# Altium PCB PCB_EIT_Spectra.pcbdoc (part 2 of 2)
Units mil, origin at the board's own origin, x right, y up, seen from the top; angles counter-clockwise.
Board outline 4400 x 3850 mil, 2 copper layers (Top Layer, Bottom Layer); 90 components, 116 nets, 615 pads, 256 vias.
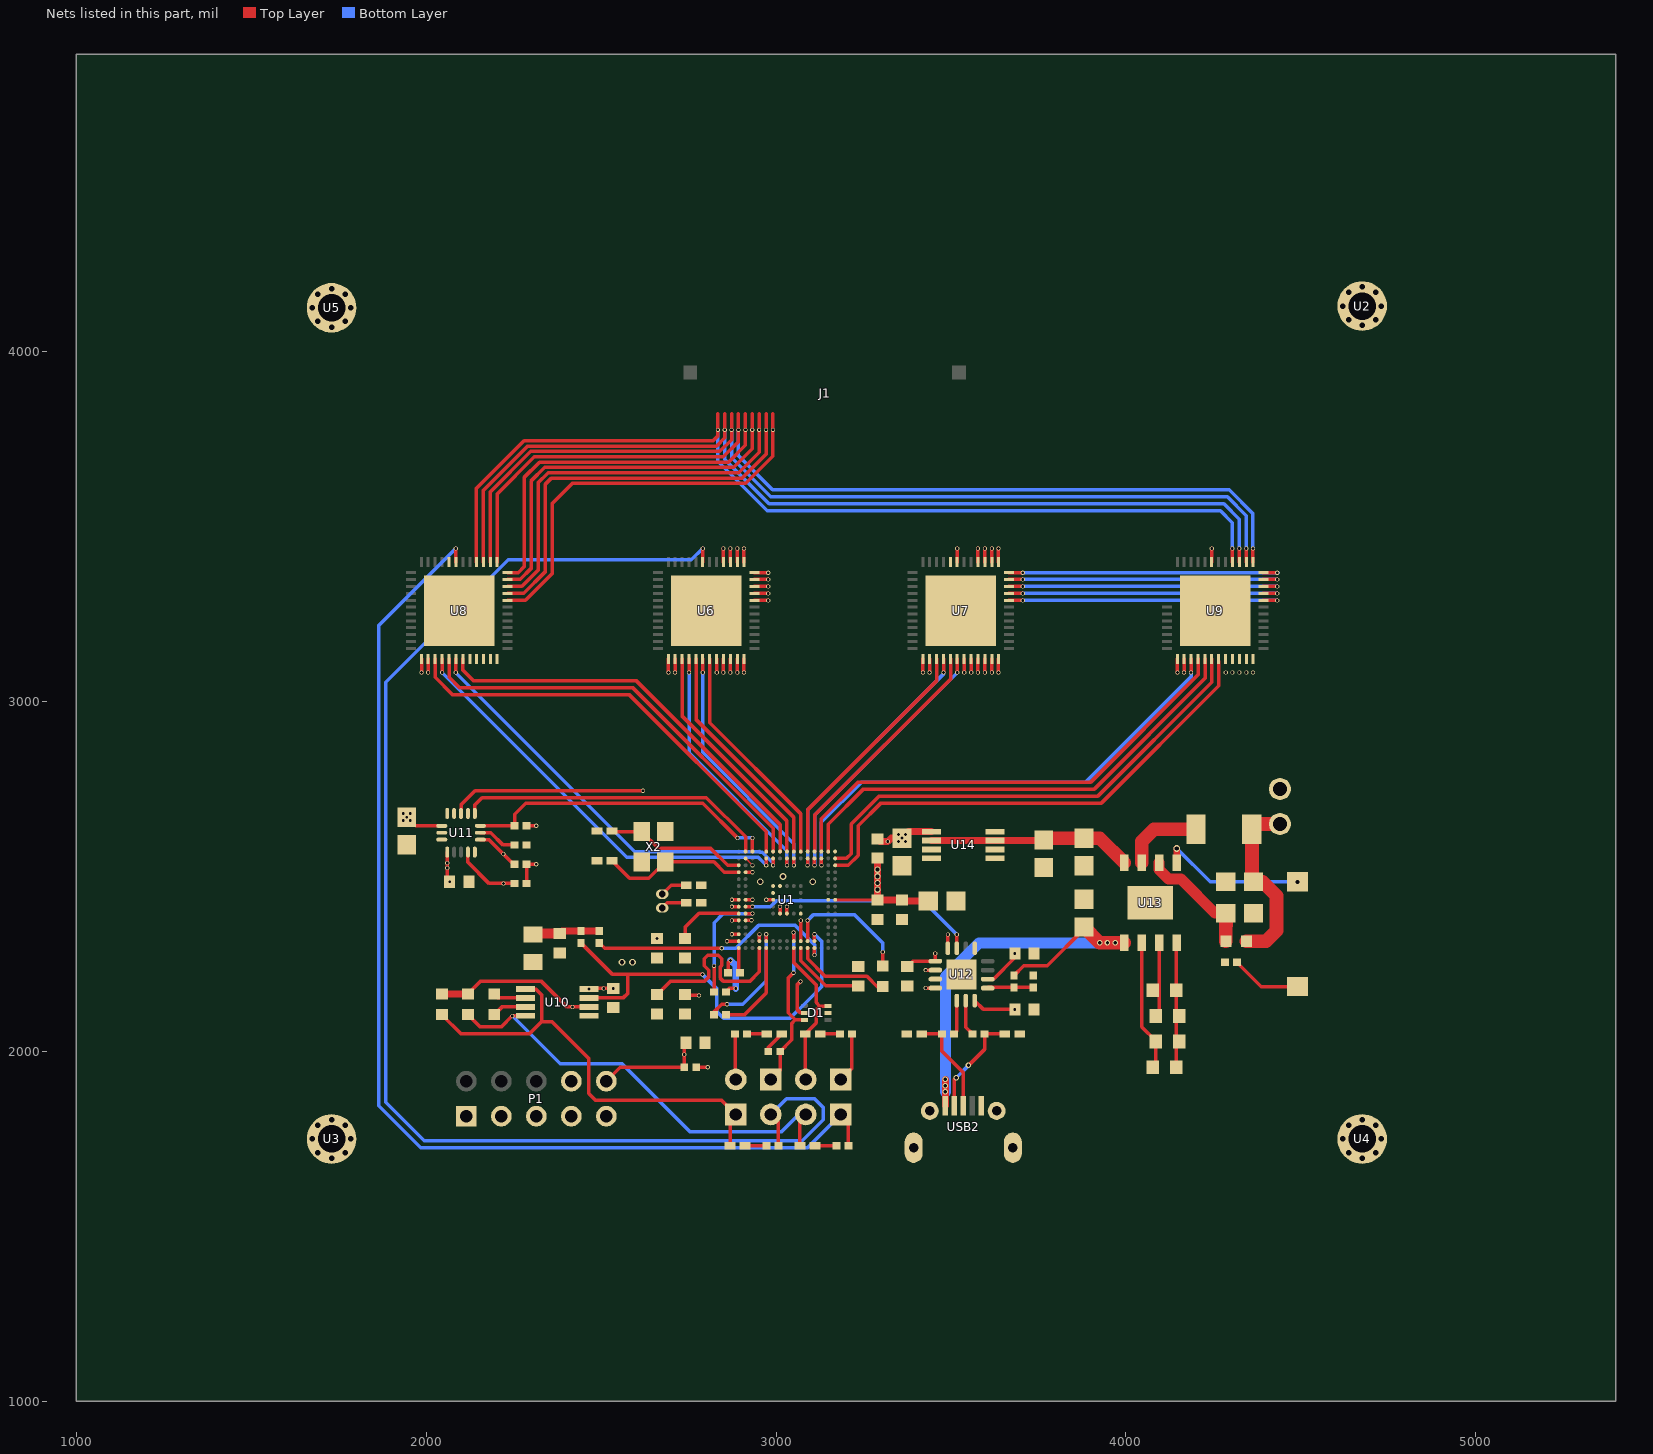
[diagram p2: the nets of this part, all layers, seen from the top]

## Via types
v1: diameter 11.81, hole 7.87, Top Layer to Bottom Layer, tented both sides, 237 vias
v2: diameter 15.75, hole 9.84, Top Layer to Bottom Layer, tented both sides, 8 vias
v3: diameter 19.69, hole 11.81, Top Layer to Bottom Layer, tented both sides, 7 vias
v4: diameter 17.72, hole 11.81, Top Layer to Bottom Layer, tented both sides, 4 vias

## Nets (pads, with @x,y where several pads share a name; then routed paths per layer and width w, separated by ;. In a path a pad name is that pad's centre, name@x,y a point inside that pad or via, vN(x,y) a via of type N, cw(c..) or ccw(c..) an arc to the next point about the centre after c; other vN are vias at no path point) (continued)
24: J1.24 U6.32 U7.32 U8.32 U9.32 | length 3894.3
  Top Layer w10: U8.32@2233,3289 2284,3289 2360,3365 2360,3565 2418.4,3623.4 2913.4,3623.4 2991.2,3701.2 v1(2991.22,3776.26) ; U6.32@2938.51,3288.99 v1(2977.87,3289) ; v1(2991.22,3776.26) J1.24@2991.22,3821.89 ; U7.32@3665.75,3289 v1(3705.13,3289) ; U9.32@4393,3289 v1(4432.38,3289)
  Mid-Layer 2 w10: v1(2977.87,3289) 2978.88,3290 3030,3290 3100,3360 3100,3525 2991.22,3633.78 v1(2991.22,3776.26)
  Mid-Layer 3 w10: v1(2991.22,3776.26) 2991.2,3683.8 3049,3626 3644,3626 3830,3440 3830,3355 3765,3290 v1@3705,3290
  Bottom Layer w10: v1(3705.13,3289) v1(4432.38,3289)
25: J1.25 U6.33 U7.33 U8.33 U9.33 | length 3827.2
  Top Layer w10: U8.33@2233,3309 2279,3309 2340,3370 2340,3620 2358.6,3638.6 2903.6,3638.6 2971.5,3706.5 v1(2971.54,3776.26) ; U6.33@2938.51,3308.99 v1(2977.87,3309) ; v1(2971.54,3776.26) J1.25@2971.54,3821.89 ; U7.33@3665.75,3309 v1(3705.13,3309) ; U9.33@4393,3309 v1(4432.38,3309)
  Mid-Layer 2 w10: v1(2971.54,3776.26) 2971.54,3623.46 3080,3515 3080,3370 3020,3310 2978.88,3310 v1(2977.87,3309)
  Mid-Layer 3 w10: v1(2971.54,3776.26) 2971.5,3678.5 3039.2,3610.8 3634.2,3610.8 3810,3435 3810,3360 3759,3309 v1(3705.13,3309)
  Bottom Layer w10: v1(3705.13,3309) v1(4432.38,3309)
26: J1.26 U6.34 U7.34 U8.34 U9.34 | length 3727.5
  Top Layer w10: U8.34@2233,3329 2274,3329 2320,3375 2320,3625 2348.8,3653.8 2893.8,3653.8 2951.9,3711.9 v1@2951.9,3776.3 ; U6.34@2938.51,3328.99 v1(2977.87,3329) ; v1(2951.85,3776.26) J1.26@2951.85,3821.89 ; U7.34@3665.75,3329 v1(3705.13,3329) ; U9.34@4393,3329 v1(4432.38,3329)
  Mid-Layer 2 w10: v1(2951.85,3776.26) 2951.85,3618.15 3060,3510 3060,3380 3009,3329 v1(2977.87,3329)
  Mid-Layer 3 w10: v1@2951.9,3776.3 2951.9,3673.1 3029.4,3595.6 3624.4,3595.6 3790,3430 3790,3370 3750,3330 3706.1,3330 v1(3705.13,3329)
  Bottom Layer w10: v1(3705.13,3329) v1(4432.38,3329)
27: J1.27 U6.35 U7.35 U8.35 U9.35 | length 3627.9
  Top Layer w10: U8.35@2233,3349 2269,3349 2300,3380 2300,3630 2339,3669 2879,3669 2932.2,3722.2 v1(2932.17,3776.26) ; v1(2932.17,3776.26) J1.27@2932.17,3821.89 ; U6.35@2938.51,3348.99 v1(2977.87,3349) ; U7.35@3665.75,3349 v1(3705.13,3349) ; U9.35@4393,3349 v1(4432.38,3349)
  Mid-Layer 2 w10: v1(2932.17,3776.26) 2932.17,3607.83 3040,3500 3040,3385 3005,3350 2978.88,3350 v1(2977.87,3349)
  Mid-Layer 3 w10: v1(2932.17,3776.26) 2932.2,3667.8 3019.6,3580.4 3614.6,3580.4 3770,3425 3770,3380 3739,3349 v1(3705.13,3349)
  Bottom Layer w10: v1(3705.13,3349) v1(4432.38,3349)
28: J1.28 U6.36 U7.36 U8.36 U9.36 | length 3535.1
  Top Layer w10: U8.36@2233,3368 2263,3368 2280,3385 2280,3640 2324.2,3684.2 2864.2,3684.2 2912.5,3732.5 v1(2912.48,3776.26) ; v1(2912.48,3776.26) J1.28@2912.48,3821.89 ; U6.36@2938.51,3367.99 v1(2977.87,3368) ; U7.36@3665.75,3368 v1(3705.13,3368) ; U9.36@4393,3368 v1(4432.38,3368)
  Mid-Layer 2 w10: v1(2912.48,3776.26) 2912.5,3602.5 3020,3495 3020,3390 2998,3368 v1(2977.87,3368)
  Mid-Layer 3 w10: v1(2912.48,3776.26) 2912.5,3662.5 3009.8,3565.2 3604.8,3565.2 3750,3420 3750,3390 3728,3368 v1(3705.13,3368)
  Bottom Layer w10: v1(3705.13,3368) v1@4435,3368
29: J1.29 U6.37 U7.37 U8.37 U9.37 | length 4444.1
  Top Layer w10: U8.37@2203,3398 2203,3593 2309.4,3699.4 2849.4,3699.4 2892.8,3742.8 v1(2892.8,3776.26) ; v1(2892.8,3776.26) J1.29@2892.8,3821.89 ; U6.37@2908.51,3397.99 v1(2908.5,3437.37) ; U7.37@3635.75,3398 v1(3635.76,3437.37) ; U9.37@4363,3398 v1(4363.01,3437.37)
  Mid-Layer 2 w10: v1(2892.8,3776.26) 2892.8,3692.8 2870,3670 2740,3670 2730,3660 2730,3645 2740,3635 2835,3635 2910,3560 2910,3438.9 v1(2908.5,3437.37)
  Mid-Layer 3 w10: v1(2892.8,3776.26) 2892.8,3657.2 3000,3550 3560,3550 3635,3475 v1(3635.76,3437.37)
  Bottom Layer w10: v1(2892.8,3776.26) 2892.8,3702.2 2990,3605 4295,3605 4363,3537 v1(4363.01,3437.37)
30: J1.30 U6.38 U7.38 U8.38 U9.38 | length 4432.3
  Top Layer w10: U8.38@2184,3398 2184,3599 2299.6,3714.6 2839.6,3714.6 2873.1,3748.1 v1(2873.11,3776.26) ; v1(2873.11,3776.26) J1.30@2873.11,3821.89 ; U6.38@2889.51,3397.99 v1(2889.49,3437.37) ; U7.38@3616.75,3398 v1@3616.75,3437.37 ; U9.38@4344,3398 v1(4344,3437.37)
  Mid-Layer 2 w10: v1(2873.11,3776.26) 2873.1,3708.1 2855,3690 2735,3690 2710,3665 2710,3640 2735,3615 2820,3615 2889.5,3545.5 v1(2889.49,3437.37)
  Mid-Layer 3 w10: v1(2873.11,3776.26) 2873.1,3651.9 2990.2,3534.8 3550.2,3534.8 3616.7,3468.3 v1@3616.7,3437.4
  Bottom Layer w10: v1(2873.11,3776.26) 2873.1,3696.9 2985,3585 4290,3585 4344,3531 v1(4344,3437.37)
  other v1: 3616.75,3437.37
31: J1.31 U6.39 U7.39 U8.39 U9.39 | length 4420.6
  Top Layer w10: U8.39@2164,3398 2164,3604 2289.8,3729.8 2829.8,3729.8 2853.4,3753.4 v1(2853.43,3776.26) ; v1(2853.43,3776.26) J1.31@2853.43,3821.89 ; U6.39@2869.51,3397.99 v1(2869.49,3437.37) ; U7.39@3596.75,3398 v1@3596.75,3437.37 ; U9.39@4324,3398 v1(4324,3437.37)
  Mid-Layer 2 w10: v1(2853.43,3776.26) 2853.4,3728.4 2835,3710 2725,3710 2690,3675 2690,3630 2725,3595 2805,3595 2869.5,3530.5 v1(2869.49,3437.37)
  Mid-Layer 3 w10: v1(2853.43,3776.26) 2853.4,3646.6 2980.5,3519.5 3540.5,3519.5 3596.7,3463.3 v1@3596.7,3437.4
  Bottom Layer w10: v1(2853.43,3776.26) 2853.4,3691.6 2980,3565 4280,3565 4324,3521 v1(4324,3437.37)
  other v1: 3596.75,3437.37
32: J1.32 U6.40 U7.40 U8.40 U9.40 | length 4417.6
  Top Layer w10: U8.40@2144,3398 2144,3609 2280,3745 2820,3745 2833.7,3758.7 v1(2833.74,3776.26) ; v1(2833.74,3776.26) J1.32@2833.74,3821.89 ; U6.40@2849.51,3397.99 v1(2849.49,3437.37) ; U7.40@3576.75,3398 v1@3576.75,3437.37 ; U9.40@4304,3398 v1(4304,3437.37)
  Mid-Layer 2 w10: v1(2833.74,3776.26) 2833.7,3748.7 2815,3730 2710,3730 2670,3690 2670,3615 2710,3575 2795,3575 2849.5,3520.5 v1(2849.49,3437.37)
  Mid-Layer 3 w10: v1(2833.74,3776.26) 2833.7,3641.3 2970.9,3504.1 3530.9,3504.1 3576.7,3458.3 v1@3576.7,3437.4
  Bottom Layer w10: v1(2833.74,3776.26) 2833.7,3686.3 2975,3545 4270,3545 4304,3511 v1(4304,3437.37)
  other v1: 3576.75,3437.37
+5V: C25.2 R24.2 U13.1 USB2.1 | length 1324.4
  Top Layer w10: R24.2@3680,2217.04 3707.95,2245 3775,2245 3880,2350 C25.2@3880,2355.63
  Top Layer w19.68: USB2.1@3483.82,1844.89 v2(3483.8,1884.33) 3483.8,1902.48 v2(3483.8,1920)
  Top Layer w39.37: C25.2@3880,2355.63 v2(3925.13,2310.5) 3948.12,2310.5 v2(3969.23,2310.5) U13.1@3995,2310.5
  Bottom Layer w31.5: v2(3483.8,1884.33) v2(3483.8,1920) 3483.8,2213.8 3580.5,2310.5 v2(3969.23,2310.5)
  other v2: 3483.8,1902.16 3947.18,2310.5
A0_A_MINUS: U1.A5 U8.15 | length 1238.5
  Top Layer w10: U8.15@2026,3122 2026,3069 2075,3020 2580,3020 2972.2,2627.8 U1.A5@2972.16,2571.29
A0_A_PLUS: U1.A8 U6.15 | length 674.9
  Top Layer w10: U6.15@2731.51,3121.99 2731.51,2958.49 3030,2660 3030,2572.5 U1.A8@3031.22,2571.29
A0_V_MINUS: U1.A11 U7.15 | length 703.4
  Top Layer w10: U1.A11@3090.27,2571.29 3090,2690 3458.7,3058.7 U7.15@3458.7,3122
A0_V_PLUS: U1.B13 U9.15 | length 1422.3
  Top Layer w10: v1(3129.65,2531.92) U1.B13@3129.64,2551.6 ; v1(4186,3082.63) U9.15@4186,3122
  Bottom Layer w10: v1(3129.65,2531.92) 3129.6,2654.7 3245,2770 3885,2770 4186,3071 v1(4186,3082.63)
A1_A_MINUS: U1.B5 U8.16 | length 1213.3
  Top Layer w10: v1(2046,3082.63) U8.16@2046,3122 ; v1(2972.17,2531.92) U1.B5@2972.16,2551.6
  Bottom Layer w10: v1(2046,3082.63) 2573.63,2555 2949.09,2555 v1(2972.17,2531.92)
A1_A_PLUS: U1.B8 U6.16 | length 725.6
  Top Layer w10: v1(2751.51,3082.63) U6.16@2751.51,3121.99 ; v1(3031.22,2531.92) U1.B8@3031.22,2551.6
  Bottom Layer w10: v1(2751.51,3082.63) 2751.5,2853.5 3031.2,2573.8 v1(3031.22,2531.92)
A1_V_MINUS: U1.B11 U7.16 | length 770.7
  Top Layer w10: v1(3090.28,2531.92) U1.B11@3090.27,2551.6 ; v1@3478.75,3082.63 U7.16@3478.75,3122
  Bottom Layer w10: v1(3090.28,2531.92) 3090.28,2690.28 3478.75,3078.75 v1@3478.75,3082.63
  other v1: 3478.75,3082.63
A1_V_PLUS: U1.A13 U9.16 | length 1386.1
  Top Layer w10: U1.A13@3129.64,2571.29 3129.6,2664.6 3235,2770 3900,2770 4206,3076 U9.16@4206,3122
A2_A_MINUS: U1.A6 U8.17 | length 1224.2
  Top Layer w10: U8.17@2066,3122 2066,3069 2095,3040 2590,3040 2991.9,2638.1 U1.A6@2991.9,2571.3
A2_A_PLUS: U1.A9 U6.17 | length 666.1
  Top Layer w10: U6.17@2771.51,3121.99 2771.5,2948.5 3050,2670 U1.A9@3050.9,2571.29
A2_V_MINUS: U1.A12 U7.17 | length 711.7
  Top Layer w10: U1.A12@3109.96,2571.29 3110,2675 3498.7,3063.7 U7.17@3498.7,3122
A2_V_PLUS: U1.A14 U9.17 | length 1383.3
  Top Layer w10: U1.A14@3149.33,2571.29 3149.3,2649.3 3250,2750 3910,2750 4226,3066 U9.17@4226,3122
A3_A_MINUS: U1.B6 U8.18 | length 1198
  Top Layer w10: v1(2085,3082.63) U8.18@2085,3122 ; v1(2991.85,2531.92) U1.B6@2991.85,2551.6
  Bottom Layer w10: v1(2085,3082.63) 2596.5,2570.2 2953.6,2570.2 2954.7,2569.1 2960.9,2569.1 2991.9,2538.1 v1@2991.9,2531.9
A3_A_PLUS: U1.B9 U6.18 | length 717.6
  Top Layer w10: v1(2790.51,3082.63) U6.18@2790.51,3121.99 ; v1(3050.91,2531.92) U1.B9@3050.9,2551.6
  Bottom Layer w10: v1(2790.51,3082.63) 2790.51,2854.49 3050.91,2594.09 v1(3050.91,2531.92)
A3_V_MINUS: U1.B12 U7.18 | length 778.7
  Top Layer w10: v1(3109.96,2531.92) U1.B12@3109.96,2551.6 ; v1@3517.75,3082.63 U7.18@3517.75,3122
  Bottom Layer w10: v1(3109.96,2531.92) 3110,2675 v1@3517.7,3082.6
  other v1: 3517.75,3082.63
A3_V_PLUS: U1.B15 U9.18 | length 1401.3
  Top Layer w10: U1.B15@3169.01,2551.6 3201.6,2551.6 3215,2565 3215,2650 3295,2730 3920,2730 4245,3055 U9.18@4245,3122
A4_A_MINUS: U1.A7 U8.19 | length 1198.6
  Top Layer w10: U8.19@2105,3122 2105,3090 2135,3060 2600,3060 3011.54,2648.46 U1.A7@3011.53,2571.29
A4_A_PLUS: U1.A10 U6.19 | length 658.2
  Top Layer w10: U6.19@2810.51,3121.99 2810.5,2939.5 3070,2680 U1.A10@3070.59,2571.29
A4_V_MINUS: U1.K7 U7.19 | length 995.6
  Top Layer w10: U1.K7@3011.53,2394.12 v1(3011.54,2413.81) ; v1@3537.75,3082.63 U7.19@3537.75,3122
  Mid-Layer 3 w10: v1(3011.54,2413.81) 3011.5,2436.5 3030,2455 3115,2455 3537.7,2877.7 v1@3537.7,3082.6
  other v1: 3537.75,3082.63
A4_V_PLUS: U1.C15 U9.19 | length 1428.3
  Top Layer w10: U1.C15@3169.01,2531.92 3206.9,2531.9 3235,2560 3235,2645 3300,2710 3930,2710 4265,3045 U9.19@4265,3115
A_MINUS: H3.1 R12.2 U8.43 | length 3231.1
  Top Layer w10: U8.43@2085,3398 v1(2085,3437.37) ; H3.1@3185,1820 3207.05,1797.95 R12.2@3207.04,1730
  Bottom Layer w10: v1(2085,3437.37) 1865,3217.37 1865,1845 1985,1725 3090,1725 H3.1@3185,1820
A_PLUS: H2.2 R11.2 U6.43 | length 3936.8
  Top Layer w10: U6.43@2790.51,3397.99 v1(2790.49,3437.37) ; H2.2@2985,1820 3007.05,1797.96 R11.2@3007.04,1730
  Bottom Layer w10: v1(2790.49,3437.37) 2758.1,3405 2235,3405 1885,3055 1885,1855 1995,1745 3075,1745 3135,1805 3135,1840 3110,1865 3030,1865 H2.2@2985,1820
ACC_CS: R17.1 U1.A3 U11.8 | length 903.9
  Top Layer w10: U11.8@2155.12,2644.69 R17.1@2252.96,2645 ; R17.1@2252.96,2645 2252.96,2677.96 2284.81,2709.81 2790.19,2709.81 v1(2890,2610) ; U1.A3@2932.79,2571.29 v1(2932.79,2610)
  Bottom Layer w10: v1(2890,2610) v1(2932.79,2610)
ACC_INT1: U1.B2 U11.11 | length 990.4
  Top Layer w5: U1.B2@2913.11,2551.6 v1(2932.79,2531.92)
  Top Layer w10: U11.11@2100,2680.12 2100,2705 2140,2745 v1(2620,2745)
  Mid-Layer 3 w10: v1(2620,2745) 2719.71,2745 v1(2932.79,2531.92)
ACC_INT2: U1.A2 U11.9 | length 894.7
  Top Layer w10: U11.9@2139.37,2680.12 2139.4,2704.4 2160,2725 2801.2,2725 2913.1,2613.1 U1.A2@2913.11,2571.29
AFE7: C17.2 D1.3 H5.2 U1.R9 | length 447.5
  Top Layer w10: U1.R9@3050.9,2295.7 3050.9,2254.1 3115,2190 3115,2140 3124.7,2129.7 ; H5.2@3085,1920 3083.54,1921.46 C17.2@3083.54,2050 3115,2081.46 3115,2120 3124.68,2129.68 ; D1.3@3148.46,2129.68 3124.68,2129.68
AFE8: D1.6 H1.1 R9.1 U1.P9 | length 514.6
  Top Layer w10: H1.1@2985,1920 3012.05,1947.04 R9.1@3012.04,2000 3045,2032.95 3045,2080 3055.32,2090.32 ; v1(3050,2225) 3035,2210 3035,2110.63 3055.32,2090.32 ; v1(3050,2340) U1.P9@3050.9,2315.38 ; D1.6@3081.53,2090.31 3055.32,2090.32
  Bottom Layer w10: v1(3050,2225) v1(3050,2340)
AN_A: R20.2 U1.P12 U10.7 | length 1200
  Top Layer w10: R20.2@2442.78,2310.12 2532.9,2220 v1(2790,2220) ; U10.7@2465.6,2152.8 2562.8,2152.8 2576.9,2166.9 2576.9,2220 ; U1.P12@3109.96,2315.38 v1(3109.96,2335.07)
  Bottom Layer w10: v1(2790,2220) 2830,2180 2830,2115 2850,2095 3040,2095 3097.5,2152.5 3130,2185 3130,2315 v1(3109.96,2335.07)
BAT: C27.2 CN1.1 L1.2 R26.2 | length 520.9
  Top Layer w39.37: R26.2@4344.65,2315 4400,2315 4430,2345 4430,2445 4390,2485 C27.2@4364.37,2485 4359.84,2485 L1.2@4359.84,2635 4374.85,2650 CN1.1@4440,2650
C13_1: C13.1 R10.1 | length 56.5
  Top Layer w10: R10.1@2917.04,2050 C13.1@2973.54,2050
C13_2: C13.2 R9.2 | length 65.9
  Top Layer w10: R9.2@2977.96,2000 2977.95,2011.5 C13.2@3016.46,2050
C17_1: C17.1 R14.1 | length 56.5
  Top Layer w10: C17.1@3126.46,2050 R14.1@3182.96,2050
DMINUS: C20.2 R22.1 USB2.2 | length 298.4
  Top Layer w10: USB2.2@3509.41,1844.89 3510,1920 v2(3515,1925) ; v2(3550,1960) 3595.77,2005.77 R22.1@3595.76,2050 C20.2@3653.54,2050
  Bottom Layer w10: v2(3515,1925) v2(3550,1960)
DPLUS: C19.2 R21.1 USB2.3 | length 288.1
  Top Layer w10: C19.2@3416.46,2050 R21.1@3474.24,2050 ; R21.1@3474.24,2050 3474.2,2000.8 3535,1940 USB2.3@3535,1844.89
GND: C1.2 C2.2 C3.2 C4.2 C5.2 C6.2 C7.1 C8.1 C9.2 C10.1 C11.2 C12.1 C16.2 C18.1 C19.1 C20.1 C21.1 C22.1 C23.1 C24.1 C25.1 C26.1 C27.1 C28.1 C29.1 C30.1 C31.1 C32.1 CN1.2 D1.2 P1.3 P1.5 P1.9 R16.1 R19.1 R23.2 R25.1 U1.F6 U1.F7 U1.G6 U1.H14 U1.K10 U2.GND U3.GND U4.GND U5.GND U6.20 U6.21 U6.22 U6.23 U6.24 U6.49 U7.20 U7.21 U7.22 U7.23 U7.24 U7.49 U8.20 U8.21 U8.22 U8.23 U8.24 U8.49 U9.20 U9.21 U9.22 U9.23 U9.24 U9.49 U10.5 U11.5 U11.10 U11.12 U11.13 U11.15 U11.16 U12.3 U12.13 U12.17 U13.9 U14.3 U14.4 U14.5 U14.6 U14.8 USB2.5 USB2.6 USB2.7 USB2.8 USB2.9 X2.2 X2.4 | length 393.7
  Top Layer w10: v1(2830.49,3082.63) U6.20@2830.51,3121.99 ; v1(2849.49,3082.63) U6.21@2849.51,3121.99 ; v1(2869.49,3082.63) U6.22@2869.51,3121.99 ; v1(2889.49,3082.63) U6.23@2889.51,3121.99 ; v1(2908.5,3082.63) U6.24@2908.51,3121.99 ; v1@3557.75,3082.63 U7.20@3557.75,3122 ; v1@3576.75,3082.63 U7.21@3576.75,3122 ; v1@3596.75,3082.63 U7.22@3596.75,3122 ; v1@3616.75,3082.63 U7.23@3616.75,3122 ; v1(3635.76,3082.63) U7.24@3635.75,3122
  other v1: 3557.75,3082.63 3576.75,3082.63 3596.75,3082.63 3616.75,3082.63 4285,3082.63 4304,3082.63 4324,3082.63 4344,3082.63 4363.01,3082.63
  other v3: 2560,2255 2590,2255 2955,2485 3105,2485 3020,2500
HF_XTAL1: C9.1 U1.D1 X2.3 | length 414.2
  Top Layer w10: C9.1@2531.46,2545 2581.46,2495 2636.77,2495 X2.3@2683.47,2541.69 ; X2.3@2683.47,2541.69 2822.7,2541.7 2852.2,2512.2 U1.D1@2893.42,2512.23
HF_XTAL2: C10.2 U1.C1 X2.1 | length 402.6
  Top Layer w10: C10.2@2531.46,2630 2533.15,2628.31 X2.1@2616.54,2628.31 ; X2.1@2616.54,2628.31 2664.8,2580 2813.8,2580 2861.9,2531.9 U1.C1@2893.42,2531.92
INAMP_M: C14.2 H2.1 R6.1 U10.1 | length 1271.8
  Top Layer w10: R6.1@2045,2105.34 2100.3,2050 2295,2050 2330,2085 ; U10.1@2284.45,2178.39 2313.4,2178.4 2330,2161.8 2330,2085 ; C14.2@2868.54,1730 2868.54,1803.54 H2.1@2885,1820 2845.01,1860 2485,1860 2465,1880 2465,1980 2360,2085 2330,2085
INAMP_P: C15.2 H3.2 R7.2 U10.4 | length 1285.4
  Top Layer w10: R7.2@2120,2105.34 2155.34,2070 2215,2070 v1(2246.61,2101.61) U10.4@2284.45,2101.61 ; C15.2@3068.54,1730 3068.54,1803.55 H3.2@3085,1820
  Bottom Layer w10: v1(2246.61,2101.61) 2383.22,1965 2560,1965 2755,1770 3015,1770 3065,1820 H3.2@3085,1820
KEY1_2: KEY1.2 R25.2 | length 201.8
  Top Layer w10: R25.2@4317.04,2255 4386.65,2185.39 KEY1.2@4490,2185.39
LF_XTAL1: C7.2 U1.P1 X1.2 | length 332.7
  Top Layer w10: X1.2@2675,2410.32 2689.69,2425 C7.2@2743.54,2425 ; v1(2860,2315) 2893.05,2315 U1.P1@2893.42,2315.38
  Mid-Layer 2 w10: X1.2@2675,2410.32 2770.32,2315 v1(2860,2315)
LF_XTAL2: C8.2 U1.N1 X1.1 | length 344.9
  Top Layer w10: X1.1@2675,2449.68 2700.32,2475 C8.2@2743.54,2475 ; v1(2873.74,2335.06) U1.N1@2893.42,2335.07
  Mid-Layer 2 w10: X1.1@2675,2449.68 2789.63,2335.06 v1(2873.74,2335.06)
P0.6: U1.J1 U12.2 | length 692.4
  Top Layer w10: v1(2873.74,2413.8) U1.J1@2893.42,2413.81 ; v1(3427.63,2232.4) U12.2@3455.2,2232.4
  Mid-Layer 2 w10: v1(2873.74,2413.8) 2873.7,2401.3 2915,2360 2915,2345 2945,2315 3345,2315 v1(3427.63,2232.4)
P0.7: U1.J2 U12.15 | length 689.3
  Top Layer w10: U1.J2@2913.11,2413.81 v1(2932.79,2413.8) ; U12.15@3516.6,2294.8 v1(3516.6,2334.17)
  Bottom Layer w10: v1(2932.79,2413.8) 2983.8,2413.8 3000,2430 3420.77,2430 v1(3516.6,2334.17)
P0.8: P1.2 U1.H1 U12.4 | length 2165.7
  Top Layer w10: v1(2873.74,2433.49) U1.H1@2893.42,2433.49 ; v1(3427.63,2181.2) U12.4@3455.2,2181.2
  Mid-Layer 2 w10: P1.2@2215,1815 2275,1875 2275,2415 2355,2495 2870,2495 2890,2475 2890,2445 2878.49,2433.49 v1(2873.74,2433.49) 2858.49,2433.49 2845,2420 2845,2370 2860,2355 2885,2355 2900,2340 2900,2270 2988.8,2181.2 v1(3427.63,2181.2)
P0.9: P1.4 U1.H2 U12.16 | length 1628.2
  Top Layer w10: U1.H2@2913.11,2433.49 v1(2932.79,2433.49) ; U12.16@3491,2294.8 v1(3491,2334.17)
  Mid-Layer 2 w10: v1(2932.79,2433.49) 2946.5,2433.5 3005,2375 3040,2375 3075,2410 3415,2410 v1(3491,2334.17)
  Mid-Layer 3 w10: P1.4@2415,1815 2470,1870 2470,2015 2720,2265 2845,2265 2965,2385 2965,2401.3 2965,2415 2946.5,2433.5 v1(2932.79,2433.49)
P0.11: R2.1 U1.K2 | length 338.3
  Top Layer w10: R2.1@2822.96,2170 v1(2822.96,2244.68) ; U1.K2@2913.11,2394.12 v1(2932.79,2394.12)
  Bottom Layer w10: v1(2822.96,2244.68) 2823,2368 2849.1,2394.1 v1(2932.79,2394.12)
P4.2: R3.2 U1.R1 | length 74.4
  Top Layer w10: U1.R1@2893.42,2295.7 2893.4,2225 R3.2@2897.1,2225
R11_1: C14.1 R11.1 | length 61.5
  Top Layer w10: C14.1@2911.46,1730 R11.1@2972.96,1730
R12_1: C15.1 R12.1 | length 61.5
  Top Layer w10: C15.1@3111.46,1730 R12.1@3172.96,1730
R18_1: C18.2 R18.1 R19.2 R20.1 | length 194.1
  Top Layer w19.68: C18.2@2382.24,2337.17 2389.28,2344.21 R20.1@2442.78,2344.2 R18.1@2495,2344.2
  Top Layer w27.56: R19.2@2305,2334.37 2307.79,2337.17 C18.2@2382.24,2337.17
REF_EXCITE: R18.2 U1.R12 | length 719.7
  Top Layer w10: R18.2@2495,2310.12 2510.12,2295 v1(2845,2295) ; v1(3109.96,2276.01) U1.R12@3109.96,2295.7
  Bottom Layer w10: v1(2845,2295) 2885,2295 2950,2360 3055,2360 3110,2305 v1(3109.96,2276.01)
RESETX: C11.1 P1.10 R4.2 U1.K8 | length 933.6
  Top Layer w10: P1.10@2515,1915 2555,1955 R4.2@2737.96,1955 2737.95,1991.25 2737.95,2020.51 C11.1@2742.45,2025 ; U1.K8@3031.22,2394.12 v1(3031.22,2413.81)
  Mid-Layer 3 w10: v1@2738,1991.3 2738,2158 2775,2195 2875,2195 3031.2,2351.2 v1(3031.22,2413.81)
  other v1: 2737.96,1991.25
S$52775: U1.A15
S$129475: U7.44
S$129821: U8.44
SCL: R13.1 U1.L1 U11.4 | length 903.4
  Top Layer w10: U11.4@2119.69,2569.88 2119.7,2540.3 2180,2480 v1(2221.57,2480) R13.1@2252.96,2480 ; v1(2873.74,2374.43) U1.L1@2893.42,2374.44
  Mid-Layer 3 w10: v1(2221.57,2480) 2327.1,2374.4 v1(2873.74,2374.43)
SDA: R15.1 U1.L2 U11.6 | length 931.5
  Top Layer w10: U11.6@2155.12,2605.32 2180,2605 v1(2220.84,2564.16) 2250,2535 R15.1@2252.96,2535 ; U1.L2@2913.11,2374.44 2913.67,2375 v1(2930,2375)
  Mid-Layer 3 w10: v1(2220.84,2564.16) 2670.84,2564.16 2840,2395 2895,2395 2915,2375 v1(2930,2375)
TIA_I: R8.1 U1.P11 | length 378.7
  Top Layer w10: U1.P11@3090.27,2315.38 v1(3090.28,2374.44) ; R8.1@3304.89,2244.66 v1(3304.89,2284.01)
  Bottom Layer w10: v1(3090.28,2374.44) 3105.8,2390 3225,2390 3304.9,2310.1 v1(3304.89,2284.01)
TIA_O: R8.2 U1.R11 | length 278.5
  Top Layer w10: U1.R11@3090.27,2295.7 3090.28,2264.72 3140,2215 3260,2215 3289.66,2185.34 R8.2@3304.89,2185.34
U1_K1: C2.1 U1.K1 | length 199
  Top Layer w10: C2.1@2740,2322.55 2740,2355 2780,2395 U1.K1@2890,2395
U1_P5: R1.2 U1.P5 | length 346.8
  Top Layer w10: R1.2@2822.96,2105 2822.95,2112.95 2845,2135 v1(2860,2135) ; U1.P5@2972.16,2315.38 v1(2972.17,2335.07)
  Bottom Layer w10: v1(2860,2135) 2905,2135 2972.2,2202.2 v1(2972.17,2335.07)
U1_R4: C1.1 U1.R4 | length 537.7
  Top Layer w10: C1.1@2660,2162.55 2697.4,2200 2795,2200 2807.8,2212.8 2807.8,2232.2 2795,2245 2795,2265 2805,2275 2835,2275 2845,2265 2845,2245.7 2840,2240.7 2840,2210 2850,2200 2925,2200 2952.48,2227.48 U1.R4@2952.48,2295.7
U1_R5: R1.1 U1.R5 | length 269.4
  Top Layer w10: R1.1@2857.1,2105 2910,2105 2972.2,2167.2 U1.R5@2972.16,2295.7
U1_R10: C6.1 U1.R10 | length 230.5
  Top Layer w10: U1.R10@3070.59,2295.7 3070.6,2259.4 3142.6,2187.4 C6.1@3235,2187.45
U10_2: R5.1 U10.2 | length 94.4
  Top Layer w10: R5.1@2195,2164.66 2206.85,2152.8 U10.2@2284.45,2152.8
U10_3: R5.2 U10.3 | length 98.5
  Top Layer w10: R5.2@2195,2105.34 2216.86,2127.2 U10.3@2284.45,2127.2
U11_7: R16.2 U11.7 | length 112.3
  Top Layer w10: U11.7@2155.12,2625 2185,2625 2220,2590 R16.2@2252.96,2590
U12_6: R21.2 U12.6 | length 98.6
  Top Layer w10: R21.2@3508.32,2050 3516.6,2058.28 U12.6@3516.6,2145.2
U12_7: R22.2 U12.7 | length 103.3
  Top Layer w10: U12.7@3542.2,2145.2 3542.2,2069.47 R22.2@3561.68,2050
U12_9: R23.1 R24.1 U12.9 | length 131
  Top Layer w10: U12.9@3604.8,2181 3606.75,2182.95 R24.1@3680,2182.96 R23.1@3735,2182.96
U13_2: LED1.1 LED2.2 U13.2 | length 375.4
  Top Layer w10: U13.2@4045,2310.5 4045,2070 4084.81,2030.19 LED2.2@4084.81,2028.33 4084.81,1963.28 LED1.1@4076.53,1955
U13_3: LED3.2 LED4.1 U13.3 | length 220.9
  Top Layer w10: LED3.2@4084.81,2101.67 4095,2111.86 U13.3@4095,2310.5 4095,2310 U13.3@4089.81,2304.81
U13_4: LED1.2 LED2.1 LED3.1 LED4.2 U13.4 | length 356.1
  Top Layer w10: LED1.2@4143.46,1955 4143.46,2308.96 U13.4@4145,2310.5
U13_5: KEY1.1 U13.5 | length 425
  Top Layer w19.68: U13.5@4145,2539.5 v3(4145,2580)
  Bottom Layer w10: v3(4145,2580) 4240.4,2484.6 v3(4490,2484.6)
U13_6: C26.2 R26.1 U13.6 | length 341.9
  Top Layer w31.5: U13.6@4095,2539.5 4095,2520 4121.82,2493.18 4156.82,2493.18 4255,2395 C26.2@4285.63,2395
  Top Layer w39.37: R26.1@4285.35,2315 C26.2@4285.63,2395
U13_7: L1.1 U13.7 | length 230.2
  Top Layer w39.37: U13.7@4045,2539.5 4045,2600 4080,2635 L1.1@4200.16,2635
U13_8: C28.2 C29.2 U13.8 U14.2 U14.7 | length 583.1
  Top Layer w19.68: U14.2@3444.45,2602.8 U14.7@3625.55,2602.8 ; U14.7@3625.6,2602.8 3765,2602.8 C28.2@3765,2604.37
  Top Layer w39.37: C28.2@3765,2604.37 3770,2609.37 C29.2@3880,2609.37 3925.13,2609.37 U13.8@3995,2539.5
V_MINUS: H1.2 R10.2 U7.43 | length 2144.4
  Top Layer w10: R10.2@2882.96,2050 2882.95,1922.05 H1.2@2885,1920 ; U7.43@3517.75,3398 v1@3517.75,3437.37
  Mid-Layer 3 w10: H1.2@2885,1920 3285,2320 3395,2320 3675,2600 3675,3280.12 v1@3517.75,3437.37
  other v1: 3517.75,3437.37
V_PLUS: H5.1 R14.2 U9.43 | length 2142
  Top Layer w10: H5.1@3185,1920 3217.05,1952.05 R14.2@3217.04,2050 ; U9.43@4245,3398 v1(4245,3437.37)
  Mid-Layer 3 w10: H5.1@3185,1920 3190,1920 4245,2975 v1(4245,3437.37)
VBIAS_1: C5.1 R6.2 R7.1 U1.P10 U10.6 | length 1355.5
  Top Layer w10: R7.1@2120,2164.66 2155.35,2200 2330,2200 2402.8,2127.2 v1(2418.61,2127.2) U10.6@2465.56,2127.2 ; C5.1@2740,2162.55 2742.55,2160 v1(2780,2160) ; U1.P10@3070.59,2315.38 v1(3070.59,2374.44)
  Top Layer w19.68: R6.2@2045,2164.66 R7.1@2120,2164.66
  Mid-Layer 2 w10: v1(2418.61,2127.2) 2451.41,2160 v1(2780,2160)
  Mid-Layer 3 w10: v1(2780,2160) 2900,2160 3070.6,2330.6 3070.6,2384.4
VCC_ANA: C3.1 C12.2 C31.2 C32.2 D1.5 L2.1 U1.D2 U1.H15 U1.P4 U6.13 U6.14 U7.13 U7.14 U8.13 U8.14 U9.13 U9.14 U10.8 | length 921.5
  Top Layer w10: v1(1987,3082.63) U8.13@1987,3122 ; v1(2006,3082.63) U8.14@2006,3122 ; v1(2465.55,2178.39) 2467.27,2180.11 v1(2507.5,2180.11) v1(2535,2180.11) ; v1(2692.49,3082.63) U6.13@2692.51,3121.99 ; v1(2711.49,3082.63) U6.14@2711.51,3121.99 ; U1.D2@2913.11,2512.23 v1(2932.79,2512.23) ; U1.P4@2952.48,2315.38 v1(2952.48,2334.68) ; v1(3070,2200) 3060,2190 3060,2120 3070.01,2109.99 D1.5@3081.53,2110 ; U1.H15@3169.01,2433.49 C3.1@3290,2432.55 ; v1@3419.75,3082.63 U7.13@3419.75,3122 ; v1@3438.75,3082.63 U7.14@3438.75,3122 ; v1(4147,3082.63) U9.13@4147,3122 ; v1(4166,3082.63) U9.14@4166,3122
  Top Layer w19.68: L2.1@3289.99,2552.45 v4(3290,2519.49) 3290,2499.49 3290,2479.49 3290,2462.35 C3.1@3290,2432.55 3322.46,2432.55 C32.2@3360,2432.55 3362.56,2430 3394.96,2430 C31.2@3435.63,2430
  other v1: 3419.75,3082.63 3438.75,3082.63
  other v4: 3290,2462.35 3290,2481.39 3290,2500.44
VCC_DIG: C4.1 C16.1 C21.2 C22.2 C23.2 C24.2 C30.2 L2.2 P1.1 R2.2 R3.1 R4.1 R13.2 R15.2 R17.2 U1.H6 U11.1 U11.14 U12.1 U12.8 U12.10 U14.1 | length 1050.4
  Top Layer w10: v1(1935,2680) 1970.31,2644.69 U11.14@2044.88,2644.69 ; U11.1@2060.63,2569.88 v1(2060.63,2538.56) v1(2060.63,2524.11) 2060.62,2491.82 v1(2067.45,2485) ; R13.2@2287.04,2480 R15.2@2287.04,2535 v1(2315,2535) ; R17.2@2287.04,2645 v1(2315,2645) ; R4.1@2772.04,1955 v1(2805,1955) ; R2.2@2857.04,2170 2867.05,2180 v1(2885,2180) ; R3.1@2862.96,2225 2862.95,2252.95 v1(2870,2260) ; v1(2972.16,2433.49) U1.H6@2991.85,2433.49 ; C23.2@3375,2242.55 3390.45,2258 U12.1@3455.2,2258 v1(3455,2280) ; U12.8@3567.8,2145.2 3593,2120 v1(3682.44,2120) ; U12.10@3604.8,2206.6 3621.6,2206.6 3682.44,2267.44 v1(3682.44,2280)
  Top Layer w19.68: L2.2@3289.99,2607.55 3297.56,2600 v1(3319.39,2600) 3329.39,2610 v1(3360,2610) 3378.39,2628.39 U14.1@3444.45,2628.39
  Bottom Layer w19.68: v1(2870,2260) 2885,2245 v1(2885,2180)
  other v1: 2660,2322.55 3350,2600 3370,2600 3350,2620 3370,2620 1935,2660 1955,2660 1945,2669.37 1955,2680
pads on no net: D1.1 D1.4 J1.MP1 J1.MP2 P1.6 P1.7 P1.8 U1.A1 U1.A4 U1.B1 U1.B3 U1.B4 U1.B7 U1.B10 U1.B14 U1.C2 U1.C14 U1.D14 U1.D15 U1.E1 U1.E2 U1.E14 U1.E15 U1.F1 U1.F2 U1.F8 U1.F9 U1.F10 U1.F14 U1.F15 U1.G1 U1.G2 U1.G10 U1.G14 U1.G15 U1.H10 U1.J6 U1.J10 U1.J14 U1.J15 U1.K6 U1.K9 U1.K14 U1.K15 U1.L14 U1.L15 U1.M1 U1.M2 U1.M14 U1.M15 U1.N2 U1.N14 U1.N15 U1.P2 U1.P3 U1.P6 U1.P7 U1.P8 U1.P13 U1.P14 U1.P15 U1.R2 U1.R3 U1.R6 U1.R7 U1.R8 U1.R13 U1.R14 U1.R15 U6.41 U6.42 U6.44 U7.41 U7.42 U8.41 U8.42 U9.41 U9.42 U9.44 U11.2 U11.3 U12.5 U12.11 U12.12 U12.14 USB2.4

## Polygon pours and split planes (outlines as drawn)
GND on Bottom Layer (solid): 1550,4305 1570,4285 1570,1580 1575,1575 4825,1575 4835,1585 4835,4290
VCC_DIG on Mid-Layer 3 (solid): 1545,4290 1550,4285 1550,1595 1560,1605 4815,1605 4825,1615 4825,4295
VCC_ANA on Mid-Layer 2 (solid): 1540,4320 1535,4315 1535,1555 1565,1585 4825,1585 4820,1590 4820,4305
GND on Top Layer (solid): 1510,4350 1500,4340 1500,1505 1505,1500 4900,1500 4855,1545 4855,4345

## Text inside footprints (layer, text, board x,y; h text height)
P1: Top Overlay "SWD" at 2195,1585 h80; Top Overlay "10" at 2565,1890 h50; Top Overlay "5" at 2565,1840 h50 r180; Top Overlay "1" at 2015,1840 h50 r180; Top Overlay "6" at 2012.82,1939.9 h50 r185